# EAGLE board tian_light_rgb_revd (EAGLE 6.1)
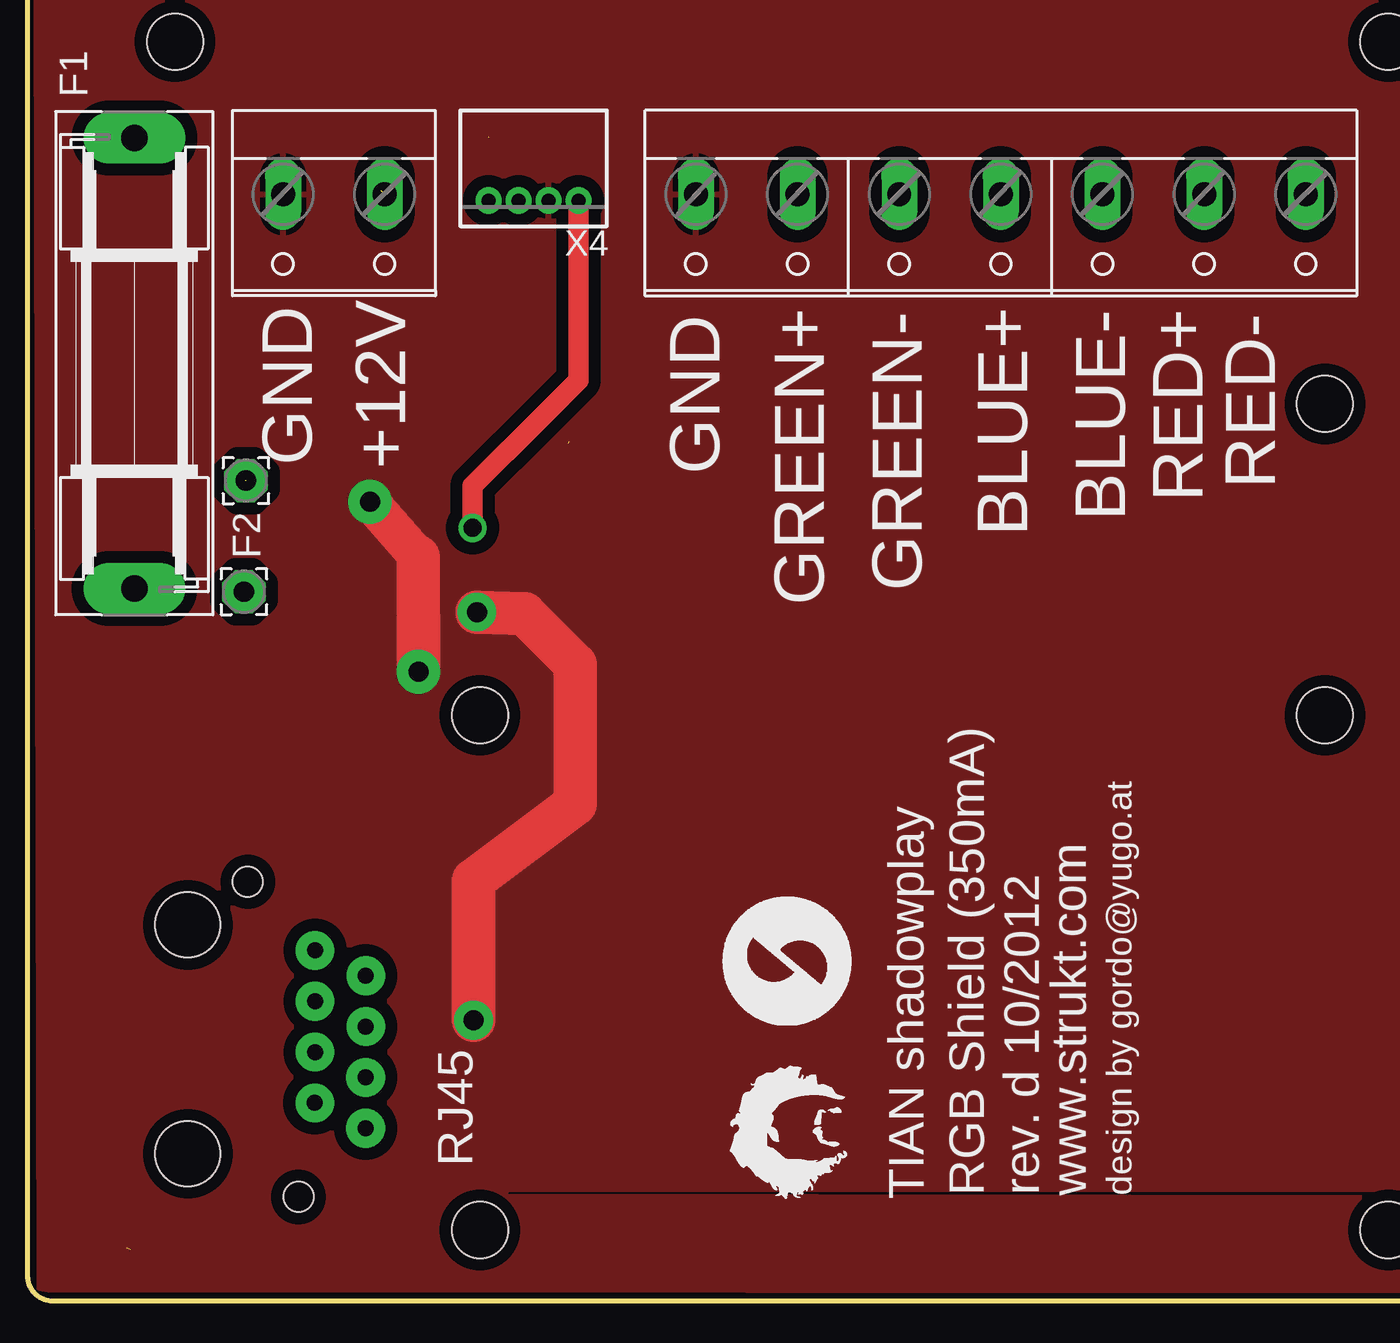
[diagram p0: board, top side]
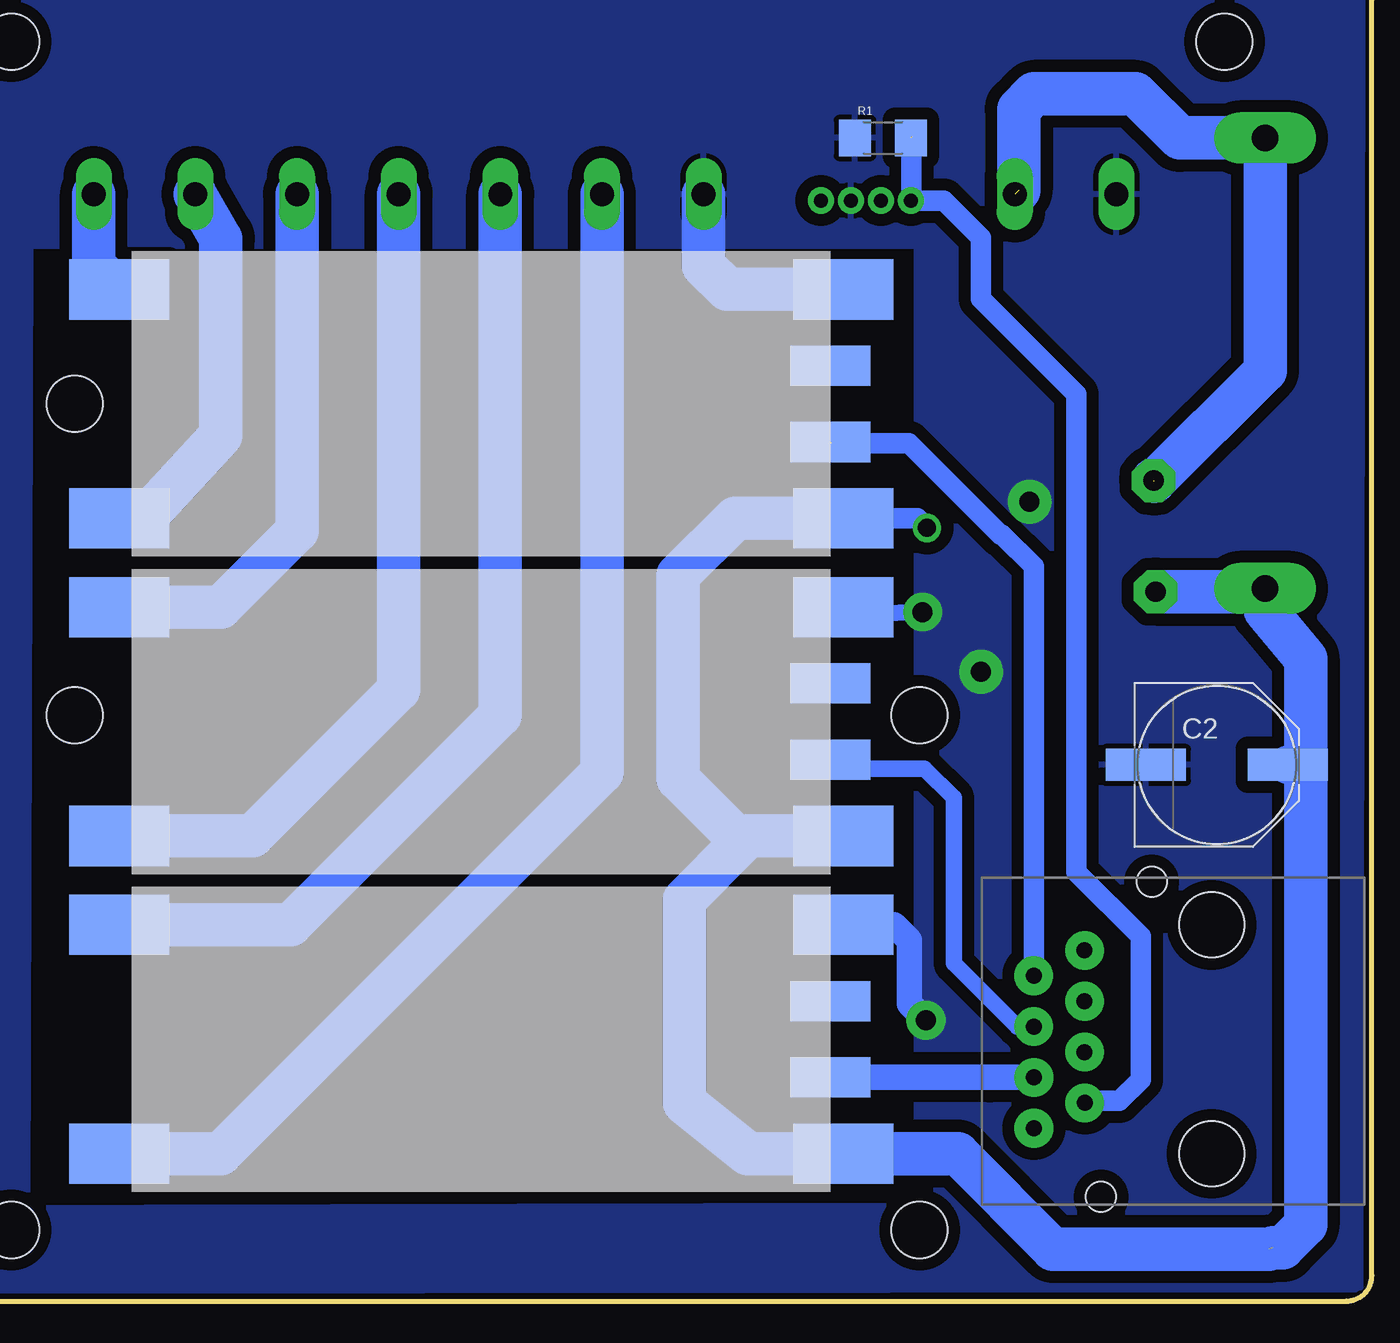
[diagram p1: board, bottom side, seen from below]

No outline drawn. Coordinates in mm, seen from the top.
Copper layers (1*16): Top 0.035mm / dielectric 1.5mm / Bottom 0.035mm
Design rules: minimum track width 8mil, minimum drill 20mil, track to track 8mil, track to pad 8mil, pad to pad 8mil, via to via 8mil, smd to smd 8mil, copper to edge 10mil, drill to drill 8mil, minimum pad ring 12mil, minimum via ring 10mil, stop-mask expansion 4mil, vias tented up to drill 25mil, thermal gap 10mil
Holes 2.8 mm at 65.09,62.55 4.45,62.55 65.09,3.17 61.91,28.89 61.91,44.45 19.68,28.89 19.68,3.17
Milling: 9 lines

## Footprints (pad centres in the part's own frame; a part is rotated, then mirrored left to right if it is on the bottom)
PANASONIC_F = smd 4 x 1.6: + 3.55,0; - -3.55,0
SH22,5 = drill 1.321 pad 2.54 long: 1 -11.252,0; 2 11.252,0
2,15/1,0 = drill 1.016 pad 2.159 octagon: 1 0,0
1206 = smd 1.6 x 1.8: 1 -1.4,0; 2 1.4,0
BUCK_LED_DRIVER = smd 5 x 3: ANODE -0.635,1.905; KATHODE -0.635,13.335; V+ 35.56,1.905; V- 35.56,13.335 | smd 4 x 2: PWM+ 34.925,5.715; PWM- 34.925,9.525
1PORT_ETHERNET = drill 0.8 pad 1.93: P$1 -3.82,3.81; P$2 -6.36,2.54; P$3 -3.82,1.27; P$4 -6.36,0; P$5 -3.82,-1.27; P$6 -6.35,-2.54; P$7 -3.81,-3.81; P$8 -6.35,-5.08 | hole 3.25: 2.54,-6.35; 2.54,5.08 | hole 1.5: -3,-8.51; -0.46,7.24
W237-132 = drill 1.194 long: 1 -2.54,-0.635; 2 2.54,-0.635
W237-7P = drill 1.194 long: 1 -15.24,-0.635; 2 -10.16,-0.635; 3 -5.08,-0.635; 4 0,-0.635; 5 5.08,-0.635; 6 10.16,-0.635; 7 15.24,-0.635
S4B-ZR = drill 0.7 pad 1.1: 1 -2.25,0; 2 -0.75,0; 3 0.75,0; 4 2.25,0

## Placement (x,y rotation side)
C2  220uF  [PANASONIC_F]  4.83,26.42 0 bottom
F1  [SH22,5]  2.41,46.48 270 top
PAD1  [2,15/1,0]  7.99,40.61 0 top
PAD2  [2,15/1,0]  7.89,35.06 0 top
R1  10k  [1206]  21.51,57.73 0 bottom
U$1  BUCK_LED_DRIVER  [BUCK_LED_DRIVER]  59.05,36.83 0 bottom
U$2  BUCK_LED_DRIVER  [BUCK_LED_DRIVER]  59.05,20.95 0 bottom
U$3  BUCK_LED_DRIVER  [BUCK_LED_DRIVER]  59.05,5.08 0 bottom
U$5  1PORT_ETHERNET  [1PORT_ETHERNET]  7.62,13.34 0 bottom
X1  [W237-132]  12.38,54.29 180 top
X3  [W237-7P]  45.72,54.29 180 top
X4  S4B-ZR  [S4B-ZR]  22.36,54.61 180 top

## Library data of the parts
C2 = rcl
F1 = fuse; MF: SCHURTER; MPN: 0031.8201; OC_FARNELL: 1162740; OC_NEWARK: 96F8317
PAD1 PAD2 = wirepad
R1 = SparkFun
U$1-U$3 = tian
U$5 = strukt
X1 X3 = con-wago-508; OC_FARNELL: unknown; OC_NEWARK: unknown
X4 = con-jst; MF: FARNELL; MPN: S4B-ZR(LF)(SN); OC_FARNELL: 9491830; OC_NEWARK: 38K8076

## Nets
12V: C2.+ F1.2 PAD2.1 U$1.V+ U$2.V+ U$3.V+ X4.1
+6V2: X4.3
GND: C2.- R1.1 U$1.V- U$2.V- U$3.V- X1.2 X3.7 X4.2
LED_ANODE_BLUE: U$2.ANODE X3.4
LED_ANODE_GREEN: U$3.ANODE X3.6
LED_ANODE_RED: U$1.ANODE X3.2
LED_KATHODE_BLUE: U$2.KATHODE X3.3
LED_KATHODE_GREEN: U$3.KATHODE X3.5
LED_KATHODE_RED: U$1.KATHODE X3.1
N$1: F1.1 PAD1.1 X1.1
PWM_BLUE: U$2.PWM+ U$5.P$4
PWM_GREEN: U$3.PWM+ U$5.P$6
PWM_RED: U$1.PWM+ U$5.P$2
TEMP: R1.2 U$5.P$7 X4.4

## Tracks (layer width: path | path; a pad name or v marks a point on that pad's centre or on a via)
12V  (via drill 0.9 pad 1.42)  (1 unrouted)
  Top 1.016: X4.1 24.61,45.62 21.09,42.1 | 21.09,42.1 21.04,42.05 | v19.32,38.25 19.32,40.36 21.06,42.1 21.09,42.1
  Bottom 1.016: U$1.V+ 19.8,38.73 v19.32,38.25
  Bottom 1.676: U$3.V+ 25.08,6.99 | 25.72,22.86 23.81,22.86 U$2.V+ | U$1.V+ 26.04,38.73
  Bottom 1.93: 28.57,22.54 28.26,22.86 | 23.81,22.86 23.81,23.18 | C2.+ 0.38,26.42
  Bottom 2.184: 2.22,2.22 13.02,2.22 17.78,6.99 U$3.V+ | 25.08,6.99 28.26,6.99 31.43,9.53 31.43,19.68 28.57,22.54 31.75,25.72 31.75,35.88 28.89,38.73 26.04,38.73 | 28.26,22.86 23.81,22.86 | F1.2 2.41,34.14 0.38,31.73 0.38,26.42 0.38,3.43 1.52,2.29 2.03,2.29 | 2.95,35.08 F1.2 | PAD2.1 2.41,35.06 F1.2
GND  (via drill 1 pad 1.93, 1 pad 2.18)
  Top 1.93: 16.6,36.8 v14.19,39.56
  Top 2.184: v16.61,31.06 16.6,36.8 | v19.37,13.65 19.37,20.64 24.45,24.45 24.45,31.43 21.91,33.97 v19.53,34.05
  Bottom 0.813: v19.53,34.05 23.18,33.97 U$2.V-
  Bottom 1.27: U$3.V- 20.95,18.41 20.19,17.65 20.19,14.48 v19.37,13.65
  Bottom 2.184: X3.7 30.48,51.36 29.29,50.16 U$1.V-
  pour Bottom (isolate 0.61): -2.1,0.19 67.7,0.11 67.78,4.28 21.16,4.41 21.08,6.86 19.81,6.86 19.81,52.32 64.14,52.32 64.29,4.64 67.81,4.61 67.93,65.07 -2.45,65.18 -2.35,0.3
  pour Top (isolate 0.61): -1.91,0.22 67.84,0.15 67.86,4.76 20.95,4.83 21.08,6.86 21.34,6.86 21.21,5.21 67.74,5.23 67.84,5.6 67.89,65.02 -2.5,65.24 -2.35,0.29
LED_ANODE_BLUE
  Bottom 2.184: U$2.ANODE 53.02,22.86 45.72,30.16 X3.4
LED_ANODE_GREEN
  Bottom 2.184: U$3.ANODE 54.61,6.99 35.56,26.04 X3.6
LED_ANODE_RED
  Bottom 1.93: U$1.ANODE 58.42,38.73
  Bottom 2.184: 58.42,38.73 54.61,42.86 54.61,52.7 X3.2
LED_KATHODE_BLUE
  Bottom 2.184: X3.3 50.8,38.1 54.61,34.29 U$2.KATHODE
LED_KATHODE_GREEN
  Bottom 2.184: U$3.KATHODE 51.12,18.41 40.64,28.89 X3.5
LED_KATHODE_RED
  Bottom 1.676: U$1.KATHODE 59.69,50.48 60.96,51.75
  Bottom 2.184: 60.96,51.75 X3.1
N$1  (2 unrouted)
  Bottom 2.184: 14.73,55.12 14.73,59.18 13.97,59.94 8.89,59.94 6.68,57.73 F1.1 2.41,46.11 7.95,40.58 7.95,40.62 8,40.66
PWM_BLUE
  Bottom 0.406: 17.97,16.57 17.97,16.51
  Bottom 0.813: 17.97,16.57 17.97,24.77 19.43,26.23 23.69,26.23 U$2.PWM+ | 17.97,16.51 14.8,13.34 U$5.P$4
PWM_GREEN
  Bottom 1.27: U$3.PWM+ 16.19,10.79 U$5.P$6
PWM_RED  (1 unrouted)
  Bottom 1.016: U$5.P$2 13.98,36.33 15.57,37.92 15.65,37.92 20.22,42.49 24.11,42.49
TEMP  (1 unrouted)
  Bottom 1.016: 20.08,57.8 20.08,54.61 X4.4 18.47,54.61 16.61,52.76 16.61,49.71 11.84,44.93 11.84,21.06 8.64,17.86 8.64,10.69 9.7,9.63 11.33,9.63 U$5.P$7

## Text on the board
tPlace: F1 | RED- | GND | +12V | GND | RED+ | F2 | BLUE- | BLUE+ | GREEN- | GREEN+ | RJ45 | TIAN shadowplay | RGB Shield (350mA) | rev. d 10/2012 | www.strukt.com | design by gordo@yugo.at